# EAGLE board DCC2Arduino2 (EAGLE 8.1.0)
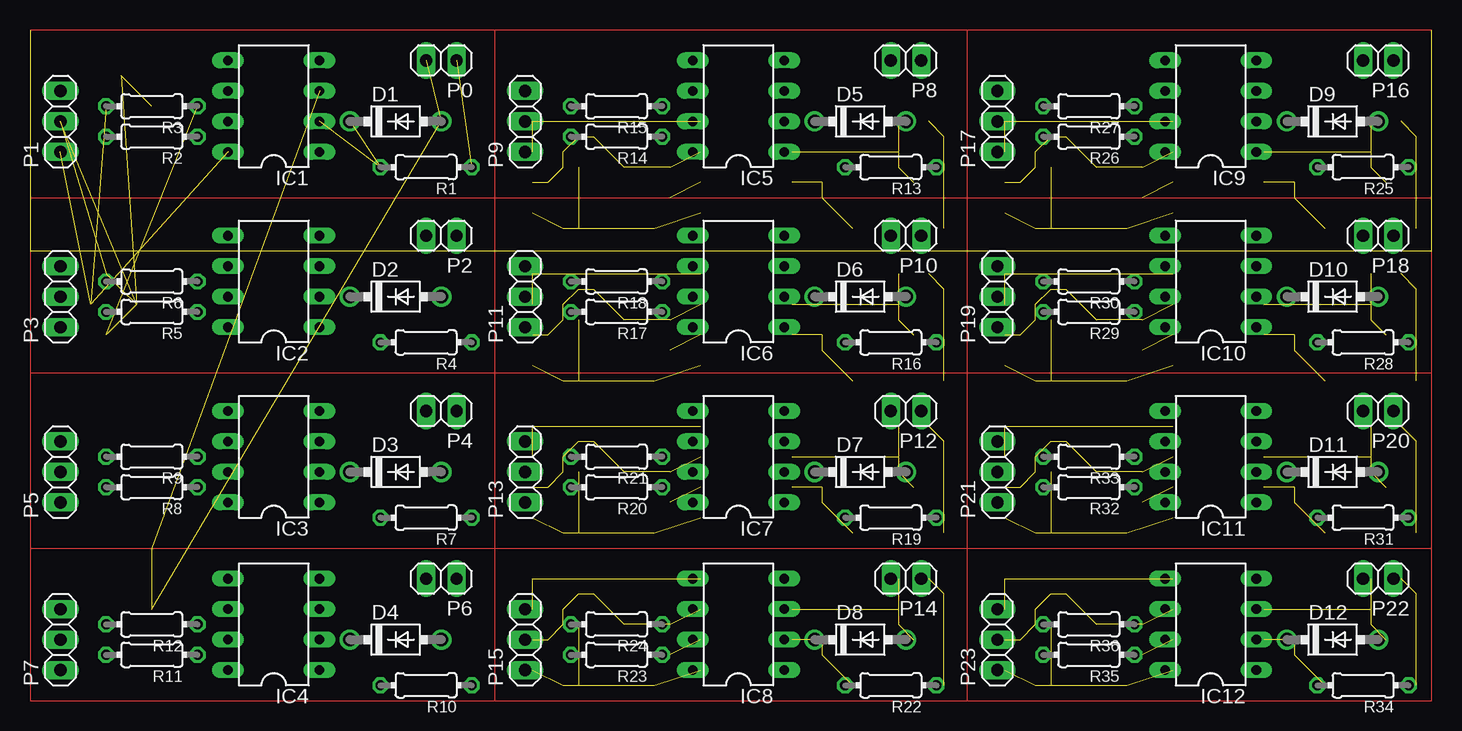
[diagram p0: board, top side]
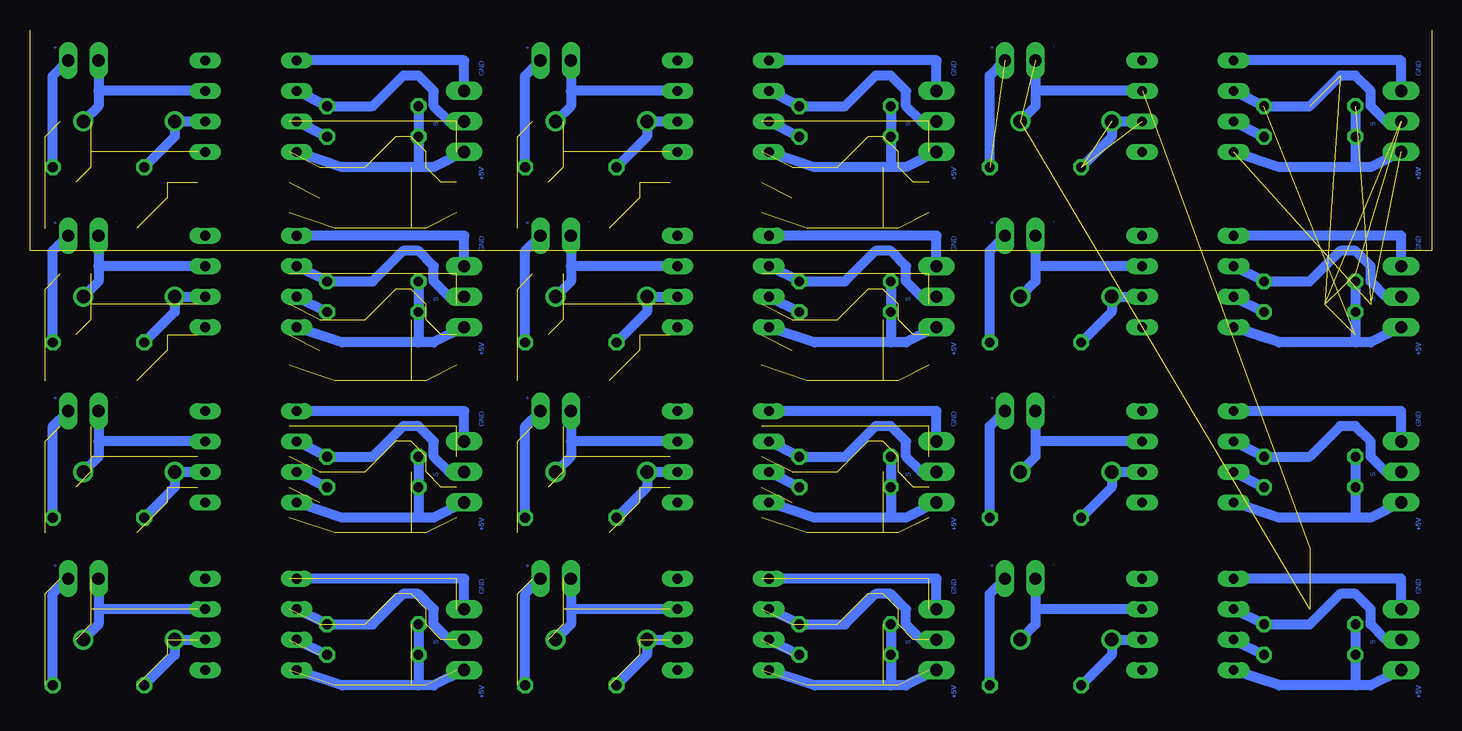
[diagram p1: board, bottom side, seen from below]

No outline drawn. Coordinates in mm, seen from the top.
Copper layers (1*16): Top 0.035mm / dielectric 1.5mm / Bottom 0.035mm
Design rules "default": minimum track width 10mil, minimum drill 24mil, track to track 8mil, track to pad 8mil, pad to pad 8mil, via to via 8mil, smd to smd 8mil, copper to edge 40mil, drill to drill 8mil, minimum pad ring 10mil, minimum via ring 8mil, stop-mask expansion 4mil, vias tented up to drill 0mil, thermal gap 10mil

## Footprints (pad centres in the part's own frame; a part is rotated, then mirrored left to right if it is on the bottom)
DO41-7 = drill 1.118: A 3.81,0; C -3.81,0
DIL08 = drill 0.813 long: 1 -3.81,-3.81; 2 -1.27,-3.81; 3 1.27,-3.81; 4 3.81,-3.81; 5 3.81,3.81; 6 1.27,3.81; 7 -1.27,3.81; 8 -3.81,3.81
1X02 = drill 1.016 long: 1 -1.27,0; 2 1.27,0
1X03 = drill 1.016 long: 1 -2.54,0; 2 0,0; 3 2.54,0
0204/7 = drill 0.813 octagon: 1 -3.81,0; 2 3.81,0

## Placement (x,y rotation side)
D1  1N4148  [DO41-7]  30.48,48.26 0 top
D2  1N4148  [DO41-7]  30.48,33.66 0 top
D3  1N4148  [DO41-7]  30.48,19.05 0 top
D4  1N4148  [DO41-7]  30.48,5.08 0 top
D5  1N4148  [DO41-7]  69.22,48.26 0 top
D6  1N4148  [DO41-7]  69.22,33.66 0 top
D7  1N4148  [DO41-7]  69.22,19.05 0 top
D8  1N4148  [DO41-7]  69.22,5.08 0 top
D9  1N4148  [DO41-7]  108.58,48.26 0 top
D10  1N4148  [DO41-7]  108.58,33.66 0 top
D11  1N4148  [DO41-7]  108.58,19.05 0 top
D12  1N4148  [DO41-7]  108.58,5.08 0 top
IC1  6N137  [DIL08]  20.32,49.53 90 top
IC2  6N137  [DIL08]  20.32,34.92 90 top
IC3  6N137  [DIL08]  20.32,20.32 90 top
IC4  6N137  [DIL08]  20.32,6.35 90 top
IC5  6N137  [DIL08]  59.05,49.53 90 top
IC6  6N137  [DIL08]  59.05,34.92 90 top
IC7  6N137  [DIL08]  59.05,20.32 90 top
IC8  6N137  [DIL08]  59.05,6.35 90 top
IC9  6N137  [DIL08]  98.42,49.53 90 top
IC10  6N137  [DIL08]  98.42,34.92 90 top
IC11  6N137  [DIL08]  98.42,20.32 90 top
IC12  6N137  [DIL08]  98.42,6.35 90 top
P0  [1X02]  34.29,53.34 180 top
P1  [1X03]  2.54,48.26 90 top
P2  [1X02]  34.29,38.73 180 top
P3  [1X03]  2.54,33.66 90 top
P4  [1X02]  34.29,24.13 180 top
P5  [1X03]  2.54,19.05 90 top
P6  [1X02]  34.29,10.16 180 top
P7  [1X03]  2.54,5.08 90 top
P8  [1X02]  73.03,53.34 180 top
P9  [1X03]  41.27,48.26 90 top
P10  [1X02]  73.03,38.73 180 top
P11  [1X03]  41.27,33.66 90 top
P12  [1X02]  73.03,24.13 180 top
P13  [1X03]  41.27,19.05 90 top
P14  [1X02]  73.03,10.16 180 top
P15  [1X03]  41.27,5.08 90 top
P16  [1X02]  112.39,53.34 180 top
P17  [1X03]  80.64,48.26 90 top
P18  [1X02]  112.39,38.73 180 top
P19  [1X03]  80.64,33.66 90 top
P20  [1X02]  112.39,24.13 180 top
P21  [1X03]  80.64,19.05 90 top
P22  [1X02]  112.39,10.16 180 top
P23  [1X03]  80.64,5.08 90 top
R1  1k  [0204/7]  33.02,44.45 180 top
R2  10k  [0204/7]  10.16,46.99 180 top
R3  10k  [0204/7]  10.16,49.53 180 top
R4  1k  [0204/7]  33.02,29.84 180 top
R5  10k  [0204/7]  10.16,32.38 180 top
R6  10k  [0204/7]  10.16,34.92 180 top
R7  1k  [0204/7]  33.02,15.24 180 top
R8  10k  [0204/7]  10.16,17.78 180 top
R9  10k  [0204/7]  10.16,20.32 180 top
R10  1k  [0204/7]  33.02,1.27 180 top
R11  10k  [0204/7]  10.16,3.81 180 top
R12  10k  [0204/7]  10.16,6.35 180 top
R13  1k  [0204/7]  71.75,44.45 180 top
R14  10k  [0204/7]  48.9,46.99 180 top
R15  10k  [0204/7]  48.9,49.53 180 top
R16  1k  [0204/7]  71.75,29.84 180 top
R17  10k  [0204/7]  48.9,32.38 180 top
R18  10k  [0204/7]  48.9,34.92 180 top
R19  1k  [0204/7]  71.75,15.24 180 top
R20  10k  [0204/7]  48.9,17.78 180 top
R21  10k  [0204/7]  48.9,20.32 180 top
R22  1k  [0204/7]  71.75,1.27 180 top
R23  10k  [0204/7]  48.9,3.81 180 top
R24  10k  [0204/7]  48.9,6.35 180 top
R25  1k  [0204/7]  111.12,44.45 180 top
R26  10k  [0204/7]  88.27,46.99 180 top
R27  10k  [0204/7]  88.27,49.53 180 top
R28  1k  [0204/7]  111.12,29.84 180 top
R29  10k  [0204/7]  88.27,32.38 180 top
R30  10k  [0204/7]  88.27,34.92 180 top
R31  1k  [0204/7]  111.12,15.24 180 top
R32  10k  [0204/7]  88.27,17.78 180 top
R33  10k  [0204/7]  88.27,20.32 180 top
R34  1k  [0204/7]  111.12,1.27 180 top
R35  10k  [0204/7]  88.27,3.81 180 top
R36  10k  [0204/7]  88.27,6.35 180 top

## Library data of the parts
D1-D12 = diode
IC1-IC12 = ic-package
P0 P1-P23 = pinhead
R1-R36 = resistor

## Nets
S$2: P0.1 R1.1
S$3: IC1.5 P1.3
S$4: D1.A IC1.3 P0.2
S$5: D1.C IC1.2 R1.2
S$6: IC1.8 P1.1 R3.2
S$7: IC1.7 R2.1
S$8: P2.1 R4.1
S$9: IC1.6 P1.2 R3.1
S$10: D2.A IC2.3 P2.2
S$11: D2.C IC2.2 R4.2
S$12: IC2.8 P3.1 R6.2
S$13: IC2.7 R5.1
S$14: IC2.6 P3.2 R6.1
S$15: IC2.5 P3.3
S$16: P4.1 R7.1
S$17: D3.A IC3.3 P4.2
S$18: D3.C IC3.2 R7.2
S$19: IC3.8 P5.1 R9.2
S$20: IC3.7 R8.1
S$21: IC3.6 P5.2 R9.1
S$22: IC3.5 P5.3
S$23: P6.1 R10.1
S$24: D4.A IC4.3 P6.2
S$25: D4.C IC4.2 R10.2
S$26: IC4.8 P7.1 R12.2
S$27: IC4.7 R11.1
S$28: IC4.6 P7.2 R12.1
S$29: IC4.5 P7.3
S$86: P8.1 R13.1
S$87: D5.A IC5.3 P8.2
S$88: D5.C IC5.2 R13.2
S$89: IC5.8 P9.1 R15.2
S$90: IC5.7 R14.1
S$91: IC5.6 P9.2 R15.1
S$92: IC5.5 P9.3
S$93: P10.1 R16.1
S$94: D6.A IC6.3 P10.2
S$95: D6.C IC6.2 R16.2
S$96: IC6.8 P11.1 R18.2
S$97: IC6.7 R17.1
S$98: IC6.6 P11.2 R18.1
S$99: IC6.5 P11.3
S$100: P12.1 R19.1
S$101: D7.A IC7.3 P12.2
S$102: D7.C IC7.2 R19.2
S$103: IC7.8 P13.1 R21.2
S$104: IC7.7 R20.1
S$105: IC7.6 P13.2 R21.1
S$106: IC7.5 P13.3
S$107: P14.1 R22.1
S$108: D8.A IC8.3 P14.2
S$109: D8.C IC8.2 R22.2
S$110: IC8.8 P15.1 R24.2
S$111: IC8.7 R23.1
S$112: IC8.6 P15.2 R24.1
S$113: IC8.5 P15.3
S$114: P16.1 R25.1
S$115: D9.A IC9.3 P16.2
S$116: D9.C IC9.2 R25.2
S$117: IC9.8 P17.1 R27.2
S$118: IC9.7 R26.1
S$119: IC9.6 P17.2 R27.1
S$120: IC9.5 P17.3
S$121: P18.1 R28.1
S$122: D10.A IC10.3 P18.2
S$123: D10.C IC10.2 R28.2
S$124: IC10.8 P19.1 R30.2
S$125: IC10.7 R29.1
S$126: IC10.6 P19.2 R30.1
S$127: IC10.5 P19.3
S$128: P20.1 R31.1
S$129: D11.A IC11.3 P20.2
S$130: D11.C IC11.2 R31.2
S$131: IC11.8 P21.1 R33.2
S$132: IC11.7 R32.1
S$133: IC11.6 P21.2 R33.1
S$134: IC11.5 P21.3
S$135: P22.1 R34.1
S$136: D12.A IC12.3 P22.2
S$137: D12.C IC12.2 R34.2
S$138: IC12.8 P23.1 R36.2
S$139: IC12.7 R35.1
S$140: IC12.6 P23.2 R36.1
S$141: IC12.5 P23.3

## Tracks (layer width: path | path; a pad name or v marks a point on that pad's centre or on a via)
S$1  (3 unrouted)
  Top 0: 38.73,0 0,0 0,12.7 | 38.73,0 78.11,0 | 78.11,0 116.84,0 116.84,12.7 | 116.84,12.7 116.84,27.3 | 116.84,27.3 116.84,41.91 | 116.84,41.91 116.84,55.88 78.11,55.88 | 78.11,55.88 38.73,55.88 | 38.73,55.88 0,55.88 0,41.91 | 0,41.91 0,27.3 | 0,27.3 0,12.7 | 38.73,55.88 38.73,0 | 78.11,55.88 78.11,0 | 0,41.91 116.84,41.91 | 0,27.3 116.84,27.3 | 0,12.7 116.84,12.7
S$2  (1 unrouted)
  Bottom 0.813: R1.1 36.83,52.07 P0.1
S$3
  Bottom 0.813: P1.3 2.54,53.34 IC1.5
S$4  (5 unrouted)
  Bottom 0.813: P0.2 33.02,50.8 | 33.02,50.8 33.02,49.53 D1.A | IC1.3 33.02,50.8
S$5  (2 unrouted)
  Bottom 0.813: R1.2 26.67,46.99 D1.C IC1.2
S$6  (3 unrouted)
  Bottom 0.813: P1.1 5.08,44.45 6.35,44.45 | 6.35,44.45 12.7,44.45 IC1.8 | R3.2 6.35,44.45
S$7
  Bottom 0.813: IC1.7 R2.1
S$8
  Bottom 0.813: R4.1 36.83,37.47 P2.1
S$9  (8 unrouted)
  Bottom 0.813: IC1.6 R3.1 10.16,49.53 7.62,52.07 6.35,52.07 5.08,50.8 5.08,49.53 3.81,48.26 P1.2
S$10
  Bottom 0.813: P2.2 33.02,36.2 | 33.02,36.2 33.02,34.92 D2.A | IC2.3 33.02,36.2
S$11
  Bottom 0.813: R4.2 26.67,32.38 D2.C IC2.2
S$12
  Bottom 0.813: P3.1 5.08,29.84 6.35,29.84 | 6.35,29.84 12.7,29.84 IC2.8 | R6.2 6.35,29.84
S$13
  Bottom 0.813: IC2.7 R5.1
S$14
  Bottom 0.813: IC2.6 R6.1 10.16,34.92 7.62,37.47 6.35,37.47 5.08,36.2 5.08,34.92 3.81,33.66 P3.2
S$15
  Bottom 0.813: P3.3 2.54,38.73 IC2.5
S$16
  Bottom 0.813: R7.1 36.83,22.86 P4.1
S$17
  Bottom 0.813: P4.2 33.02,21.59 | 33.02,21.59 33.02,20.32 D3.A | IC3.3 33.02,21.59
S$18
  Bottom 0.813: R7.2 26.67,17.78 D3.C IC3.2
S$19
  Bottom 0.813: P5.1 5.08,15.24 6.35,15.24 | 6.35,15.24 12.7,15.24 IC3.8 | R9.2 6.35,15.24
S$20
  Bottom 0.813: IC3.7 R8.1
S$21
  Bottom 0.813: IC3.6 R9.1 10.16,20.32 7.62,22.86 6.35,22.86 5.08,21.59 5.08,20.32 3.81,19.05 P5.2
S$22
  Bottom 0.813: P5.3 2.54,24.13 IC3.5
S$23
  Bottom 0.813: R10.1 36.83,8.89 P6.1
S$24
  Bottom 0.813: P6.2 33.02,7.62 | 33.02,7.62 33.02,6.35 D4.A | IC4.3 33.02,7.62
S$25
  Bottom 0.813: R10.2 26.67,3.81 D4.C IC4.2
S$26
  Bottom 0.813: P7.1 5.08,1.27 6.35,1.27 | 6.35,1.27 12.7,1.27 IC4.8 | R12.2 6.35,1.27
S$27
  Bottom 0.813: IC4.7 R11.1
S$28
  Bottom 0.813: IC4.6 R12.1 10.16,6.35 7.62,8.89 6.35,8.89 5.08,7.62 5.08,6.35 3.81,5.08 P7.2
S$29
  Bottom 0.813: P7.3 2.54,10.16 IC4.5
S$30  (2 unrouted)
S$31  (4 unrouted)
S$32  (3 unrouted)
S$33  (5 unrouted)
S$34  (1 unrouted)
S$35  (8 unrouted)
S$36  (2 unrouted)
S$37  (2 unrouted)
S$38  (4 unrouted)
S$39  (3 unrouted)
S$40  (5 unrouted)
S$41  (1 unrouted)
S$42  (8 unrouted)
S$43  (2 unrouted)
S$44  (2 unrouted)
S$45  (4 unrouted)
S$46  (3 unrouted)
S$47  (5 unrouted)
S$48  (1 unrouted)
S$49  (8 unrouted)
S$50  (2 unrouted)
S$51  (2 unrouted)
S$52  (4 unrouted)
S$53  (3 unrouted)
S$54  (5 unrouted)
S$55  (1 unrouted)
S$56  (8 unrouted)
S$57  (2 unrouted)
S$58  (2 unrouted)
S$59  (4 unrouted)
S$60  (3 unrouted)
S$61  (5 unrouted)
S$62  (1 unrouted)
S$63  (8 unrouted)
S$64  (2 unrouted)
S$65  (2 unrouted)
S$66  (4 unrouted)
S$67  (3 unrouted)
S$68  (5 unrouted)
S$69  (1 unrouted)
S$70  (8 unrouted)
S$71  (2 unrouted)
S$72  (2 unrouted)
S$73  (4 unrouted)
S$74  (3 unrouted)
S$75  (5 unrouted)
S$76  (1 unrouted)
S$77  (8 unrouted)
S$78  (2 unrouted)
S$79  (2 unrouted)
S$80  (4 unrouted)
S$81  (3 unrouted)
S$82  (5 unrouted)
S$83  (1 unrouted)
S$84  (8 unrouted)
S$85  (2 unrouted)
S$86
  Bottom 0.813: R13.1 75.56,52.07 P8.1
S$87
  Bottom 0.813: P8.2 71.75,50.8 | 71.75,50.8 71.75,49.53 D5.A | IC5.3 71.75,50.8
S$88
  Bottom 0.813: R13.2 65.41,46.99 D5.C IC5.2
S$89
  Bottom 0.813: P9.1 43.81,44.45 45.09,44.45 | 45.09,44.45 51.44,44.45 IC5.8 | R15.2 45.09,44.45
S$90
  Bottom 0.813: IC5.7 R14.1
S$91
  Bottom 0.813: IC5.6 R15.1 48.9,49.53 46.35,52.07 45.09,52.07 43.81,50.8 43.81,49.53 42.55,48.26 P9.2
S$92
  Bottom 0.813: P9.3 41.27,53.34 IC5.5
S$93
  Bottom 0.813: R16.1 75.56,37.47 P10.1
S$94
  Bottom 0.813: P10.2 71.75,36.2 | 71.75,36.2 71.75,34.92 D6.A | IC6.3 71.75,36.2
S$95
  Bottom 0.813: R16.2 65.41,32.38 D6.C IC6.2
S$96
  Bottom 0.813: P11.1 43.81,29.84 45.09,29.84 | 45.09,29.84 51.44,29.84 IC6.8 | R18.2 45.09,29.84
S$97
  Bottom 0.813: IC6.7 R17.1
S$98
  Bottom 0.813: IC6.6 R18.1 48.9,34.92 46.35,37.47 45.09,37.47 43.81,36.2 43.81,34.92 42.55,33.66 P11.2
S$99
  Bottom 0.813: P11.3 41.27,38.73 IC6.5
S$100
  Bottom 0.813: R19.1 75.56,22.86 P12.1
S$101
  Bottom 0.813: P12.2 71.75,21.59 | 71.75,21.59 71.75,20.32 D7.A | IC7.3 71.75,21.59
S$102
  Bottom 0.813: R19.2 65.41,17.78 D7.C IC7.2
S$103
  Bottom 0.813: P13.1 43.81,15.24 45.09,15.24 | 45.09,15.24 51.44,15.24 IC7.8 | R21.2 45.09,15.24
S$104
  Bottom 0.813: IC7.7 R20.1
S$105
  Bottom 0.813: IC7.6 R21.1 48.9,20.32 46.35,22.86 45.09,22.86 43.81,21.59 43.81,20.32 42.55,19.05 P13.2
S$106
  Bottom 0.813: P13.3 41.27,24.13 IC7.5
S$107
  Bottom 0.813: R22.1 75.56,8.89 P14.1
S$108
  Bottom 0.813: P14.2 71.75,7.62 | 71.75,7.62 71.75,6.35 D8.A | IC8.3 71.75,7.62
S$109
  Bottom 0.813: R22.2 65.41,3.81 D8.C IC8.2
S$110
  Bottom 0.813: P15.1 43.81,1.27 45.09,1.27 | 45.09,1.27 51.44,1.27 IC8.8 | R24.2 45.09,1.27
S$111
  Bottom 0.813: IC8.7 R23.1
S$112
  Bottom 0.813: IC8.6 R24.1 48.9,6.35 46.35,8.89 45.09,8.89 43.81,7.62 43.81,6.35 42.55,5.08 P15.2
S$113
  Bottom 0.813: P15.3 41.27,10.16 IC8.5
S$114
  Bottom 0.813: R25.1 114.94,52.07 P16.1
S$115
  Bottom 0.813: P16.2 111.12,50.8 | 111.12,50.8 111.12,49.53 D9.A | IC9.3 111.12,50.8
S$116
  Bottom 0.813: R25.2 104.78,46.99 D9.C IC9.2
S$117
  Bottom 0.813: P17.1 83.19,44.45 84.45,44.45 | 84.45,44.45 90.81,44.45 IC9.8 | R27.2 84.45,44.45
S$118
  Bottom 0.813: IC9.7 R26.1
S$119
  Bottom 0.813: IC9.6 R27.1 88.27,49.53 85.72,52.07 84.45,52.07 83.19,50.8 83.19,49.53 81.92,48.26 P17.2
S$120
  Bottom 0.813: P17.3 80.64,53.34 IC9.5
S$121
  Bottom 0.813: R28.1 114.94,37.47 P18.1
S$122
  Bottom 0.813: P18.2 111.12,36.2 | 111.12,36.2 111.12,34.92 D10.A | IC10.3 111.12,36.2
S$123
  Bottom 0.813: R28.2 104.78,32.38 D10.C IC10.2
S$124
  Bottom 0.813: P19.1 83.19,29.84 84.45,29.84 | 84.45,29.84 90.81,29.84 IC10.8 | R30.2 84.45,29.84
S$125
  Bottom 0.813: IC10.7 R29.1
S$126
  Bottom 0.813: IC10.6 R30.1 88.27,34.92 85.72,37.47 84.45,37.47 83.19,36.2 83.19,34.92 81.92,33.66 P19.2
S$127
  Bottom 0.813: P19.3 80.64,38.73 IC10.5
S$128
  Bottom 0.813: R31.1 114.94,22.86 P20.1
S$129
  Bottom 0.813: P20.2 111.12,21.59 | 111.12,21.59 111.12,20.32 D11.A | IC11.3 111.12,21.59
S$130
  Bottom 0.813: R31.2 104.78,17.78 D11.C IC11.2
S$131
  Bottom 0.813: P21.1 83.19,15.24 84.45,15.24 | 84.45,15.24 90.81,15.24 IC11.8 | R33.2 84.45,15.24
S$132
  Bottom 0.813: IC11.7 R32.1
S$133
  Bottom 0.813: IC11.6 R33.1 88.27,20.32 85.72,22.86 84.45,22.86 83.19,21.59 83.19,20.32 81.92,19.05 P21.2
S$134
  Bottom 0.813: P21.3 80.64,24.13 IC11.5
S$135
  Bottom 0.813: R34.1 114.94,8.89 P22.1
S$136
  Bottom 0.813: P22.2 111.12,7.62 | 111.12,7.62 111.12,6.35 D12.A | IC12.3 111.12,7.62
S$137
  Bottom 0.813: R34.2 104.78,3.81 D12.C IC12.2
S$138
  Bottom 0.813: P23.1 83.19,1.27 84.45,1.27 | 84.45,1.27 90.81,1.27 IC12.8 | R36.2 84.45,1.27
S$139
  Bottom 0.813: IC12.7 R35.1
S$140
  Bottom 0.813: IC12.6 R36.1 88.27,6.35 85.72,8.89 84.45,8.89 83.19,7.62 83.19,6.35 81.92,5.08 P23.2
S$141
  Bottom 0.813: P23.3 80.64,10.16 IC12.5

## Text on the board
Bottom: - | + | - | + | - | + | GND | GND | GND | S | S | S | +5V | +5V | +5V | +5V | +5V | +5V | - | + | - | + | - | + | GND | GND | GND | S | S | S | +5V | +5V | +5V | +5V | +5V | +5V | - | + | - | + | - | + | GND | GND | GND | S | S | S | +5V | +5V | +5V | +5V | +5V | +5V | - | + | - | + | - | + | GND | GND | GND | S | S | S | +5V | +5V | +5V | +5V | +5V | +5V